# Altium PCB Control board.PcbDoc
Units mm, origin at the board's own origin, x right, y up, seen from the top; angles counter-clockwise.
Board outline 74.55 x 83.83 mm, 2 copper layers (Top Layer, Bottom Layer); 75 components, 51 nets, 277 pads, 29 vias.
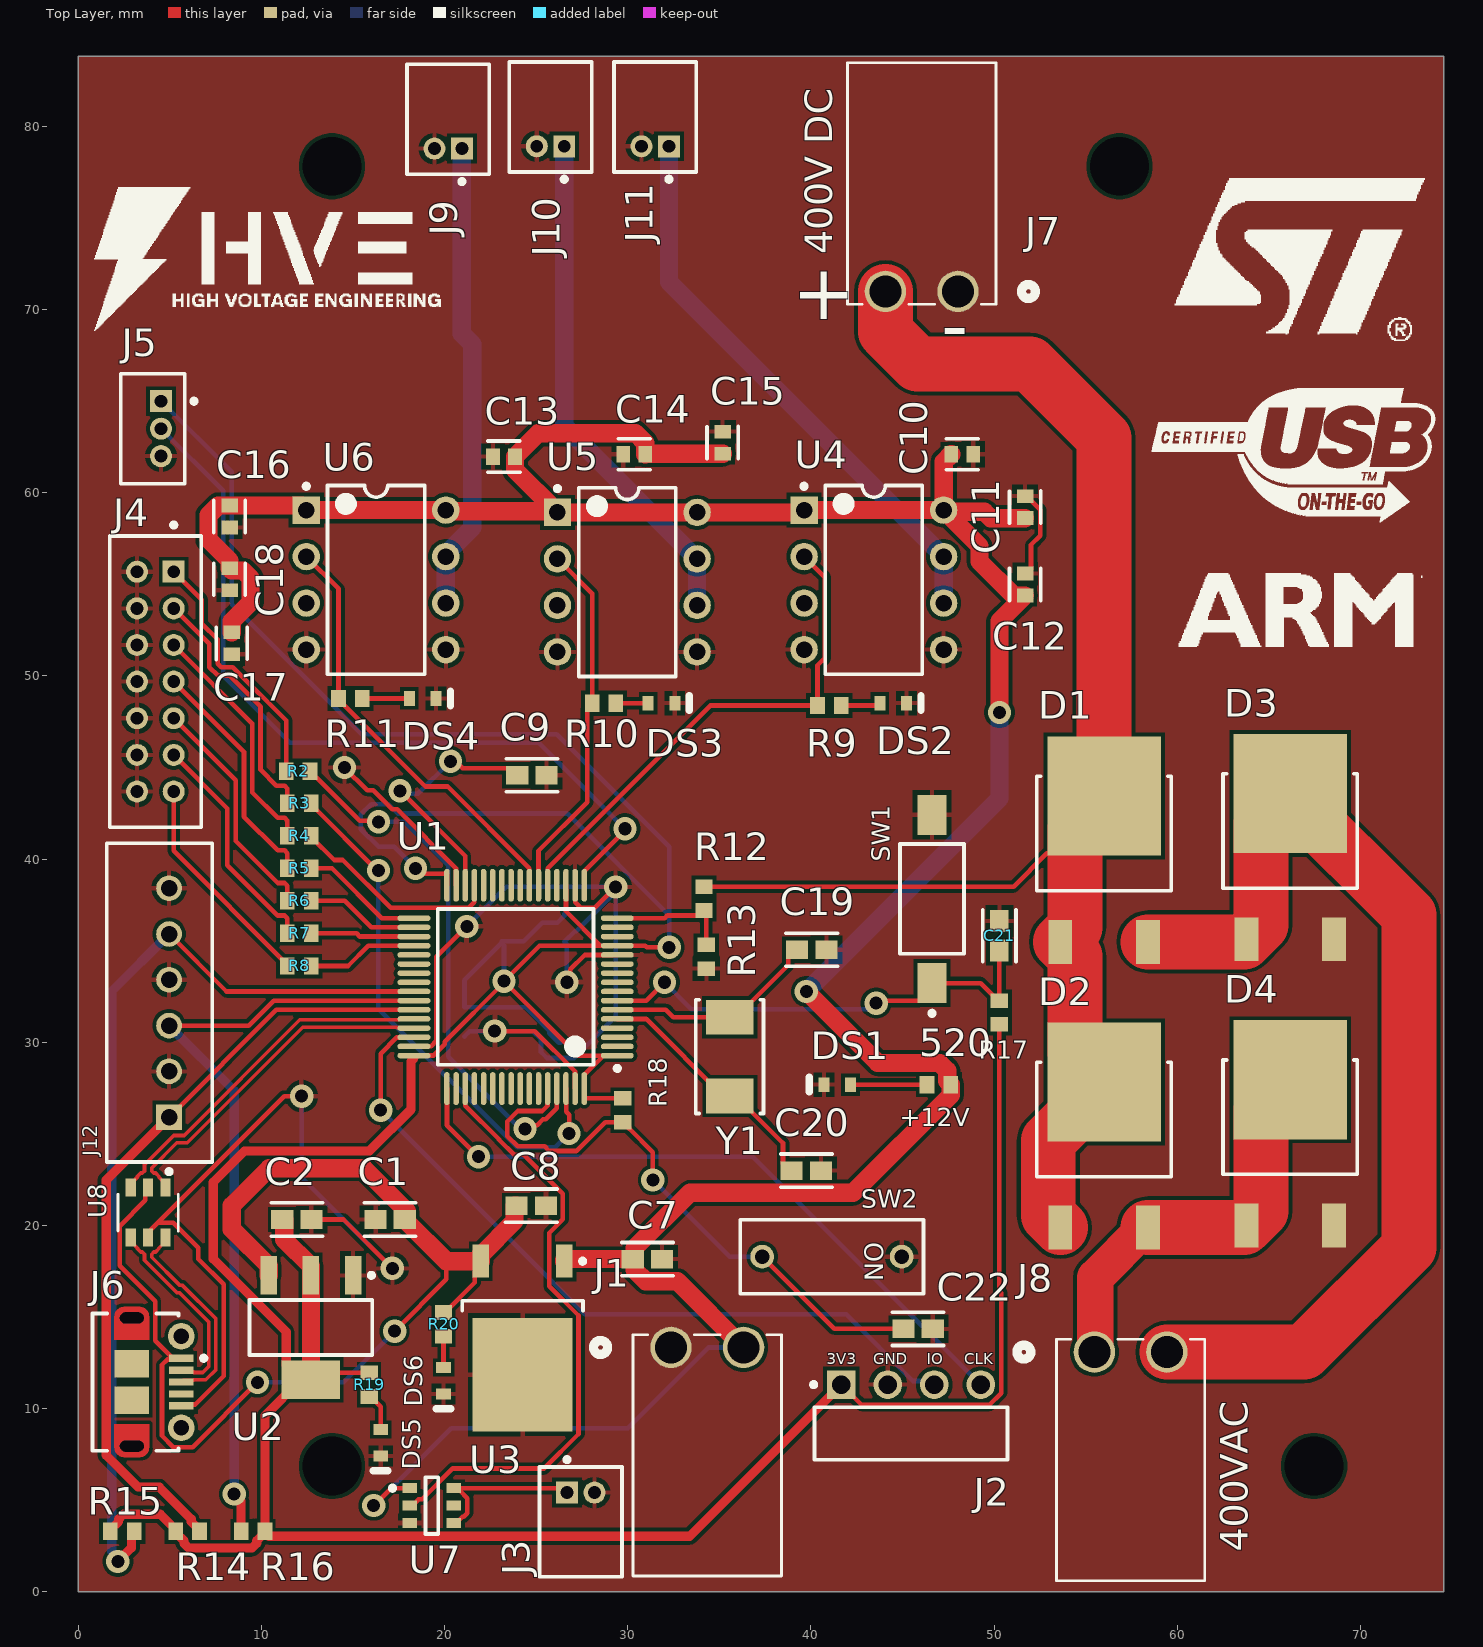
[diagram p0: Top Layer view]
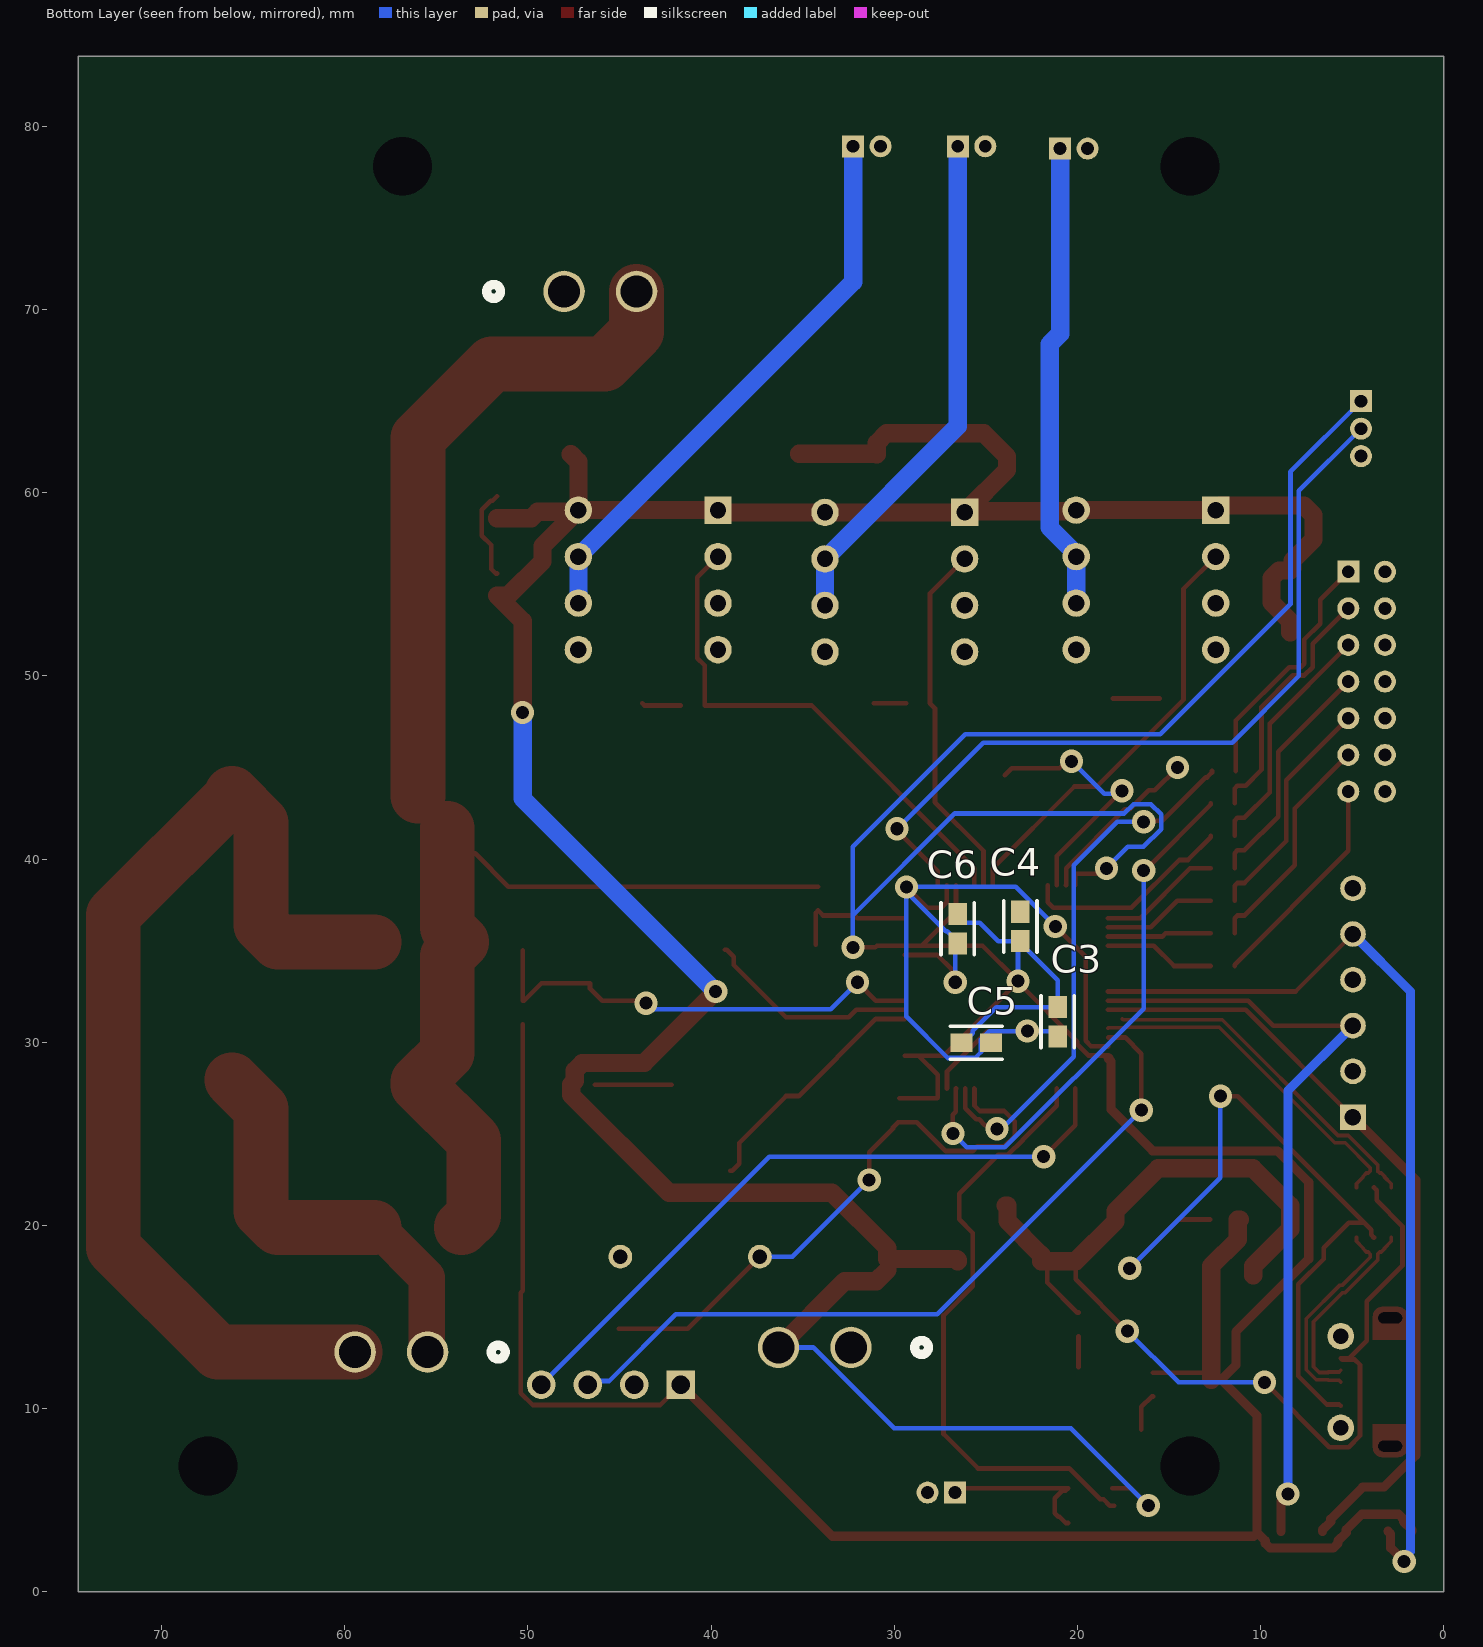
[diagram p1: Bottom Layer view, seen from below]
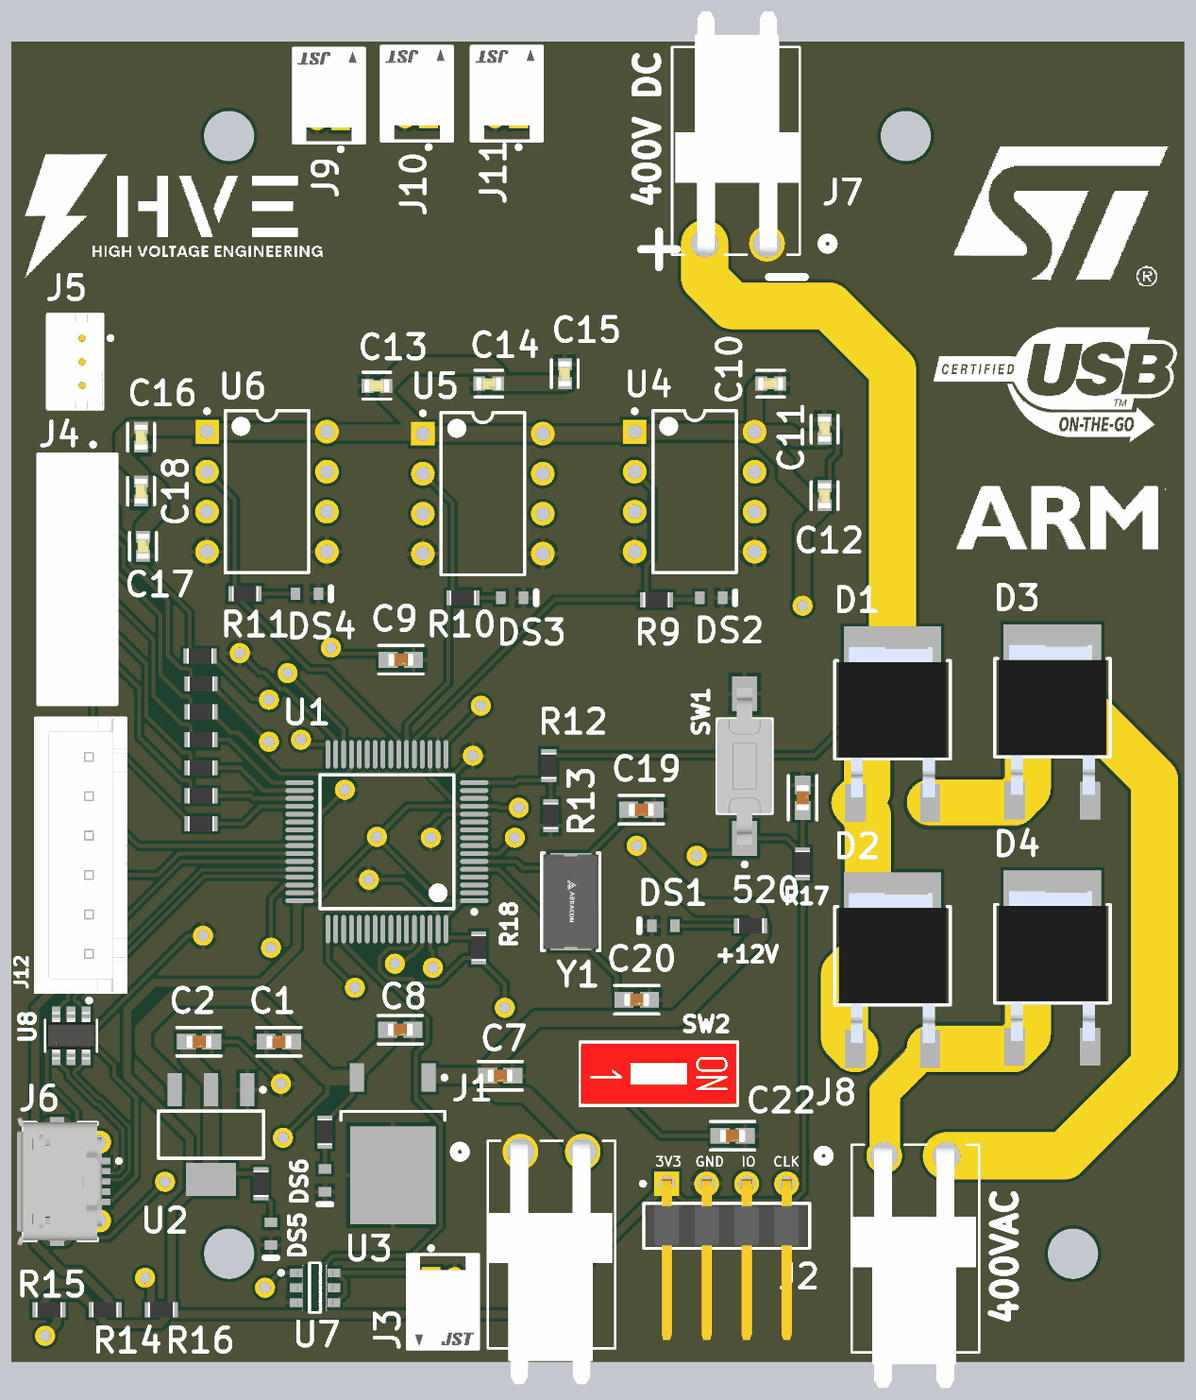
[diagram p2: 3D render of the assembled board from above, using the file's embedded part models]
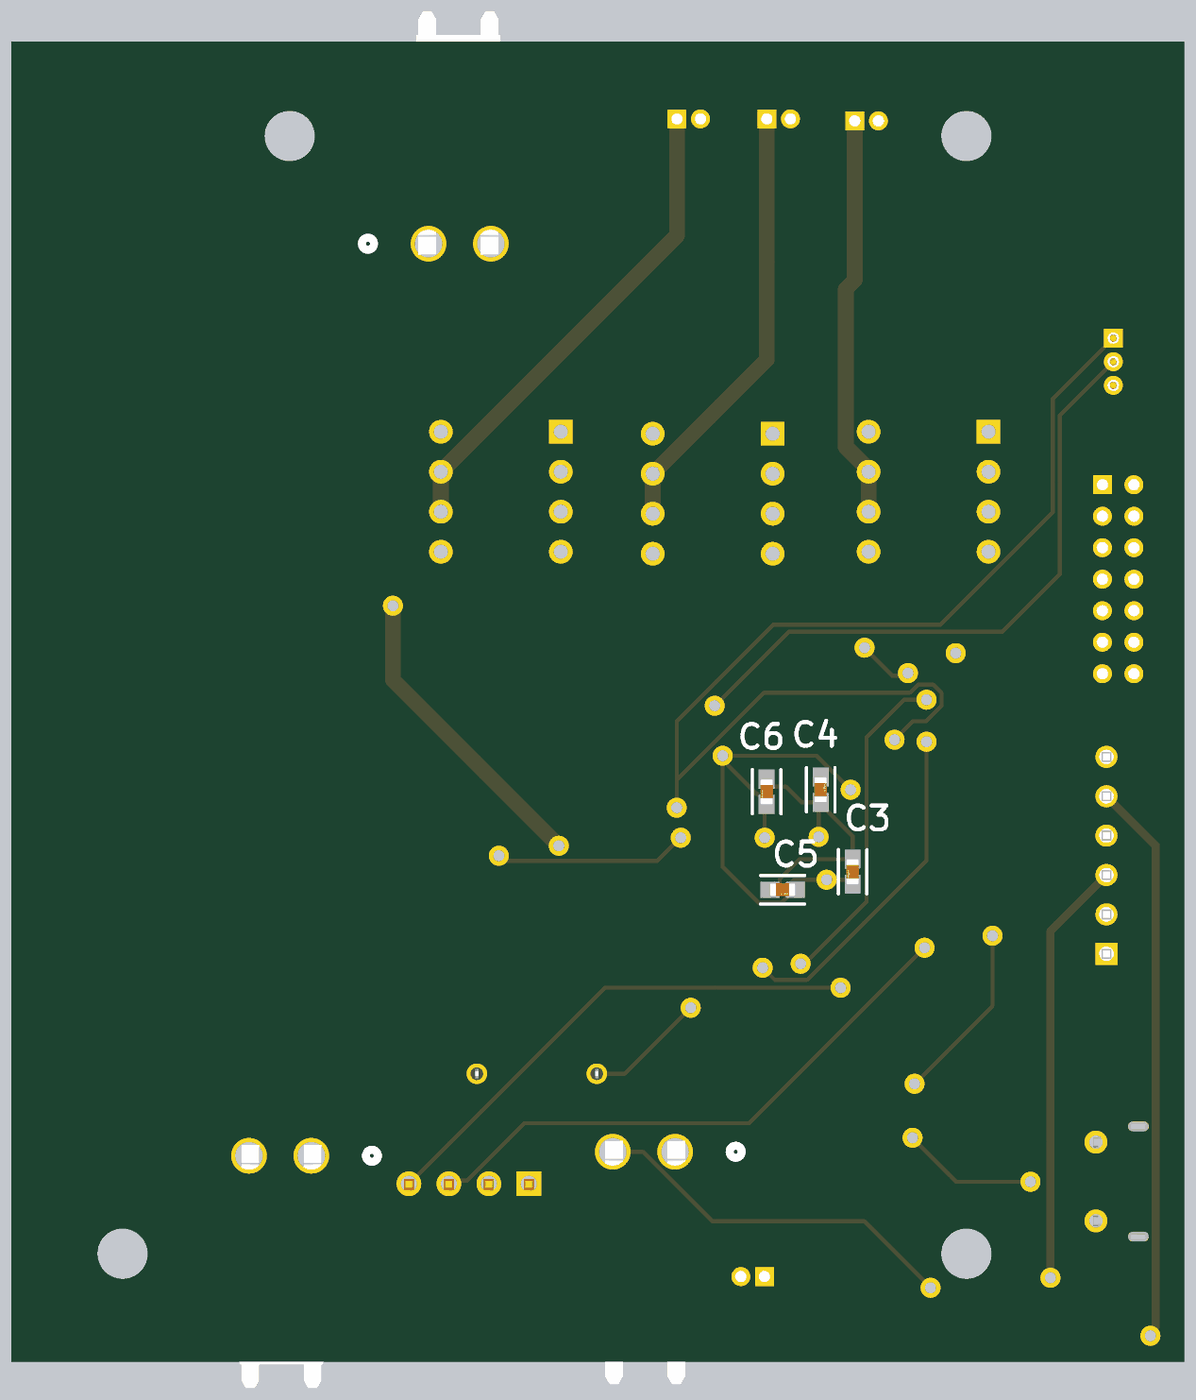
[diagram p3: 3D render of the assembled board from below, using the file's embedded part models]

## Layer stack, top to bottom
Top Solder: solder mask 0.0102, Solder Resist, Dk 3.5
Top Layer: signal copper 0.0356
Dielectric 1: dielectric 0.32, FR-4, Dk 4.8
Bottom Layer: signal copper 0.0356
Bottom Solder: solder mask 0.0102, Solder Resist, Dk 3.5

## Board outline
0,0 74.55,0 74.55,83.83 0,83.83

## Design rules (kind name [scope] priority, off if disabled: settings)
Clearance [All] p1: gap=0.2 ignorepadtopadclearanceinfootprint=FALSE except(0: Arc-Hole Track-Hole SMDPad-Hole THPad-Hole Via-Hole Fill-Hole Poly-Hole Region-Hole Text-Hole; 0.15: SMDPad-SMDPad)
DiffPairsRouting [All] p1: maxlimit=0.254 minlimit=0.01 mostfreqgap=0.254 toplayer_prefgap=0.2 toplayer_minwidth=0.05 toplayer_maxwidth=0.2 toplayer_prefwidth=0.1 bottomlayer_mingap=0.15 bottomlayer_minwidth=0.2 bottomlayer_maxwidth=0.381 bottomlayer_prefwidth=0.381 maxuncoupledlength=12.7
HoleSize [All] p1: absolutevalues=TRUE maxlimit=10 minlimit=0.025 maxpercent=80.000 minpercent=20.000
MinimumSolderMaskSliver [All] p1: minsoldermaskwidth=0.1
PolygonConnect [All] p1: connectstyle=Relief reliefconductorwidth=0.254 reliefentries=4 polygonreliefangle="90 Angle" airgapwidth=0.254
RoutingVias [All] p1: holewidth=0.711 width=1.27 viastyle="Through Hole" minholewidth=0.711 minwidth=1.27 maxholewidth=0.711 maxwidth=1.27
SilkToSolderMaskClearance [IsPad] p1: minsilkscreentomaskgap=0.1 clearancetoexposedcopper=TRUE
SolderMaskExpansion [All] p1: expansion=0 istentingtop=FALSE
Width [All] p1: maxlimit=10 minlimit=0.254 preferedwidth=0.254 minimp=50.000000 maximp=50.000000 favimp=50.000000
26 further rules are at their usual default settings.

## Classes and differential pairs
component class "Control Board 2": C21 C22 J4 J6 J12 R17 R18 SW1 SW2 U7 U8
component class "Control board": 520 C1 C2 C3 C4 C5 C6 C7 C8 C9 C10 C11 C12 C13 C14 C15 C16 C17 C18 C19 C20 D1 D2 D3 D4 DS1 DS2 DS3 DS4 DS5 DS6 J1 J2 J3 J5 J7 J8 J9 J10 J11 R2 R3 R4 R5 R6 R7 R8 R9 R10 R11 R12 R13 R14 R15 R16 R19 R20 U1 U2 U3 U4 U5 U6 Y1
differential pair USB: +USB_P -USB_N
differential pair CONN_D: +CONN_D_P -CONN_D_N

## Components (designator, comment, footprint, x,y, rotation, side; value= is the part's Value field where it differs from the comment)
520 "1k" RESC1609X50X30NL8T20 46.99,27.686 r0 top
C1 "0.1u" FP-GRM188-0_1-e0_2_0_55-IPC_A 17.018,20.32 r180 top
C2 "10u" FP-GRM188-0_1-e0_2_0_55-IPC_A 11.938,20.32 r0 top
C3 "0.1u" FP-GRM188-0_1-e0_2_0_55-IPC_A 21.082,31.115 r270 bottom
C4 "0.1u" FP-GRM188-0_1-e0_2_0_55-IPC_A 23.114,36.322 r90 bottom
C5 "0.1u" FP-GRM188-0_1-e0_2_0_55-IPC_A 25.527,29.972 r180 bottom
C6 "0.1u" FP-GRM188-0_1-e0_2_0_55-IPC_A 26.543,36.195 r270 bottom
C7 "0.33u" FP-GRM188-0_1-e0_2_0_55-IPC_A 31.075,18.161 r0 top
C8 "0.1u" FP-GRM188-0_1-e0_2_0_55-IPC_A 24.725,21.082 r0 top
C9 "2.2u" FP-GRM188-0_1-e0_2_0_55-IPC_A 24.765,44.577 r0 top
C10 "0.1u" FP-C0603C-CF-MFG 48.26,62.103 r0 top value="0.10 μF"
C11 "0.1u" FP-C0603C-CF-MFG 51.689,59.217 r90 top value="0.10 μF"
C12 "4.7u" FP-C0603C-CF-MFG 51.689,54.991 r90 top value="0.10 μF"
C13 "0.1u" FP-C0603C-CF-MFG 23.241,61.976 r180 top value="0.10 μF"
C14 "0.1u" FP-C0603C-CF-MFG 30.353,62.103 r180 top value="0.10 μF"
C15 "4.7u" FP-C0603C-CF-MFG 35.179,62.738 r90 top value="0.10 μF"
C16 "0.1u" FP-C0603C-CF-MFG 8.255,58.709 r270 top value="0.10 μF"
C17 "0.1u" FP-C0603C-CF-MFG 8.382,51.781 r270 top value="0.10 μF"
C18 "4.7u" FP-C0603C-CF-MFG 8.255,55.28 r270 top value="0.10 μF"
C19 "26p" FP-GRM188-0_1-e0_2_0_55-IPC_A 40.045,35.052 r0 top
C20 "26p" FP-GRM188-0_1-e0_2_0_55-IPC_A 39.751,22.987 r0 top
C21 "0.1u" FP-GRM188-0_1-e0_2_0_55-IPC_A 50.292,35.814 r90 top
C22 "0.1u" FP-GRM188-0_1-e0_2_0_55-IPC_A 45.847,14.351 r0 top
D1 "C3D02065E" FP-TO-252-2_v2-MFG 56.007,41.392 r0 top
D2 "C3D02065E" FP-TO-252-2_v2-MFG 56.007,25.781 r0 top
D3 "C3D02065E" FP-TO-252-2_v2-MFG 66.167,41.529 r0 top
D4 "C3D02065E" FP-TO-252-2_v2-MFG 66.167,25.908 r0 top
DS1 "POWER" VISH-TLMX1100_V 41.439,27.686 r180 top
DS2 "Coil 1" VISH-TLMX1100_V 44.487,48.514 r0 top
DS3 "Coil 2" VISH-TLMX1100_V 31.84,48.514 r0 top
DS4 "Coil 3" VISH-TLMX1100_V 18.796,48.768 r0 top
DS5 "3V3" VISH-TLMX1100_V 16.51,8.128 r270 top
DS6 "+5V" VISH-TLMX1100_V 19.939,11.52 r270 top
J1 "B2PS-VH(LF)(SN)" CONN_B2PS-VH_JST 32.362,13.335 r0 top
J2 "PH1RB-04-UA" FP-PH1RB-04-UA-MFG 45.466,8.636 r180 top
J3 "S2B-ZR(LF)(SN)" FP-S2B-ZR_LF_SN-MFG 27.432,3.81 r0 top
J4 "B14B-PHDSS(LF)(SN)" FP-B14B-PHDSS_LF_SN-MFG 4.207,49.689 r90 top
J5 "B3B-ZR(LF)(SN)" FP-B3B-ZR_LF_SN-MFG 4.064,63.5 r90 top
J6 "105017-0001" USB-MICRO-B_V 4.271,11.446 r270 top
J7 "B2PS-VH(LF)(SN)" CONN_B2PS-VH_JST 48.029,70.993 r180 top
J8 "B2PS-VH(LF)(SN)" CONN_B2PS-VH_JST 55.476,13.081 r0 top
J9 "S2B-ZR(LF)(SN)" FP-S2B-ZR_LF_SN-MFG 20.193,80.391 r180 top
J10 "S2B-ZR(LF)(SN)" FP-S2B-ZR_LF_SN-MFG 25.781,80.518 r180 top
J11 "S2B-ZR(LF)(SN)" FP-S2B-ZR_LF_SN-MFG 31.496,80.518 r180 top
J12 "B6B-XH-A(LF)(SN)" FP-B6B-XH-A_LF_SN-MFG 4.428,32.158 r90 top
R2 "1k" RESC1609X50X30NL8T20 12.002,44.805 r0 top
R3 "1k" RESC1609X50X30NL8T20 12.065,43.053 r0 top
R4 "1k" RESC1609X50X30NL8T20 12.065,41.275 r0 top
R5 "1k" RESC1609X50X30NL8T20 12.065,39.497 r0 top
R6 "1k" RESC1609X50X30NL8T20 12.065,37.719 r0 top
R7 "1k" RESC1609X50X30NL8T20 12.065,35.941 r0 top
R8 "1k" RESC1609X50X30NL8T20 12.065,34.163 r0 top
R9 "1k" RESC1609X50X30NL8T20 41.006,48.387 r180 top
R10 "1k" RESC1609X50X30NL8T20 28.702,48.514 r180 top
R11 "1k" RESC1609X50X30NL8T20 14.859,48.768 r180 top
R12 "1k" RESC1609X50X30NL8T20 34.163,37.846 r90 top
R13 "1k" RESC1609X50X30NL8T20 34.29,34.671 r90 top
R14 "1k" RESC1609X50X30NL8T20 5.969,3.302 r180 top
R15 "1k" RESC1609X50X30NL8T20 2.398,3.302 r180 top
R16 "1k" RESC1609X50X30NL8T20 9.54,3.302 r0 top
R17 "10k" RESC1609X50X30NL8T20 50.292,31.623 r90 top
R18 "10k" RESC1609X50X30NL8T20 29.718,26.289 r270 top
R19 "1k" RESC1609X50X30NL8T20 15.875,11.303 r90 top
R20 "1k" RESC1609X50X30NL8T20 19.939,14.59 r90 top
SW1 "FSMSMTR" TECO-FSMSMTR_V 46.609,37.823 r90 top
SW2 "418117270901" 418117270901 41.148,18.288 r270 top
U1 "STM32F401RBT6" STM-LQFP64_N 23.876,33.02 r180 top
U2 "LD1117S33TR" SOT-223_L 12.7,14.422 r270 top
U3 "L78M05CDT-TR" TO-252_L 24.257,13.843 r270 top
U4 "TC4420VPA" PDIP300-PA8 43.434,55.245 r0 top
U5 "TC4420VPA" PDIP300-PA8 29.972,55.118 r0 top
U6 "TC4420VPA" PDIP300-PA8 16.256,55.245 r0 top
U7 "ZXGD3005E6TA" FP-SOT26_SC74R-MFG 19.304,4.699 r0 top
U8 "USBLC6-2SC6" SOT23-6L_STM 3.81,20.701 r90 top
Y1 "" FP-ABM7-MFG 35.56,29.21 r270 top

## Footprints (in the part's own frame and the unit in brackets; to place one, negate y for a bottom-side part, rotate by r counter-clockwise, add the part's x,y. Pads: shape width x height; smd on the part's side, far side on the other; paste and mask are expansions set on the pad)
418117270901 [mm] "2.54 mm compact THT with raised actuator, 1p"
  round 1.3 hole 0.8: 1(0,-3.81) 2(0,3.81)
  silkscreen extent -2.02,-5 2.02,5, body extent -1.92,-4.95 1.92,4.95, height 6.9
CONN_B2PS-VH_JST [mil]
  round 89 / inner round 60 / far side round 89 hole 69 paste-99999 mask+0: 1(0,0) 2(155.91,0)
  silkscreen extent -166,-492 237,27, body extent -80,-582 230,27, height 335
FP-ABM7-MFG [mm]
  rect 1.9x2.6 smd paste+0 mask+0: 1(-2.15,0) 2(2.15,0)
  silkscreen extent -3.1,-1.85 3.1,1.85, body extent -3.2,-1.95 3.2,1.95, height 0.25
FP-B3B-ZR_LF_SN-MFG [mm]
  rect 1.2x1.2 hole 0.7 paste-2539.97 mask+0: 1(1.5,-0.45)
  round 1.2 hole 0.7 paste-2539.97 mask+0: 2(0,-0.45) 3(-1.5,-0.45)
  silkscreen extent -3,-2.38 3,1.75, body extent -3.1,-1.85 3.1,1.85, height 0.25
FP-B6B-XH-A_LF_SN-MFG [mm]
  rect 1.4x1.4 hole 0.9 paste-2539.97 mask+0: 1(-6.25,-0.525)
  round 1.4 hole 0.9 paste-2539.97 mask+0: 2(-3.75,-0.525) 3(-1.25,-0.525) 4(1.25,-0.525) 5(3.75,-0.525) 6(6.25,-0.525)
  silkscreen extent -9.35,-2.88 8.7,2.88, body extent -8.8,-2.98 8.8,2.98, height 0.25
FP-B14B-PHDSS_LF_SN-MFG [mm]
  rect 1.2x1.2 hole 0.7 paste-2539.97 mask+0: 1(6,-1)
  round 1.2 hole 0.7 paste-2539.97 mask+0: 2(6,1) 3(4,-1) 4(4,1) 5(2,-1) 6(2,1) 7(0,-1) 8(0,1) 9(-2,-1) 10(-2,1) 11(-4,-1) 12(-4,1) 13(-6,-1) 14(-6,1)
  silkscreen extent -7.95,-2.5 8.67,2.5, body extent -8.05,-2.6 8.05,2.6, height 0.25
FP-C0603C-CF-MFG [mm]
  rect 0.75x0.9 smd paste+0 mask+0: 1(-0.6,0) 2(0.6,0)
  silkscreen extent -0.87,-0.85 0.88,0.85, body extent -1.2,-0.6 1.2,0.6, height 0.25
FP-GRM188-0_1-e0_2_0_55-IPC_A [mm]
  rect 1.208x1.012 smd paste+0 mask+0: 1(-0.802,0) 2(0.802,0)
  silkscreen extent -1.41,-0.91 1.41,0.91, body extent -1.91,-1.01 1.91,1.01, height 0.25
FP-PH1RB-04-UA-MFG [mm]
  rect 1.57x1.57 hole 1.02 paste-2539.97 mask+0: 1(3.81,-2.667)
  round 1.57 hole 1.02 paste-2539.97 mask+0: 2(1.27,-2.667) 3(-1.27,-2.667) 4(-3.81,-2.667)
  silkscreen extent -5.27,-2.79 5.44,1.44, body extent -5.37,-3.55 5.37,7.89, height 0.25
FP-S2B-ZR_LF_SN-MFG [mm]
  rect 1.2x1.2 hole 0.7 paste-2539.97 mask+0: 1(-0.75,1.6)
  round 1.2 hole 0.7 paste-2539.97 mask+0: 2(0.75,1.6)
  silkscreen extent -2.25,-3 2.25,3.52, body extent -2.35,-3.1 2.35,3.1, height 0.25
FP-SOT26_SC74R-MFG [mm]
  rect 0.8x0.55 smd paste+0 mask+0: 1(-1.2,0.95) 2(-1.2,0) 3(-1.2,-0.95) 4(1.2,-0.95) 5(1.2,0) 6(1.2,0.95)
  silkscreen extent -2.27,-1.55 0.35,1.55, body extent -1.7,-1.65 1.7,1.65, height 0.25
FP-TO-252-2_v2-MFG [mm]
  rect 1.3x2.4 smd paste+0 mask+0: 1(-2.39,-5.908) 2(2.39,-5.908)
  rect 6.2x6.5 smd paste+0 mask+0: 3(0,2.042)
  silkscreen extent -3.67,-3.12 3.67,3.12, body extent -3.77,-7.21 3.77,5.39, height 0.25
PDIP300-PA8 [mm] "DIP, 8-Pin, Row Spacing 7.62 mm, Pitch 2.54 mm"
  rect 1.5x1.5 hole 0.9: 1(-3.81,3.81)
  round 1.5 hole 0.9: 2(-3.81,1.27) 3(-3.81,-1.27) 4(-3.81,-3.81) 5(3.81,-3.81) 6(3.81,-1.27) 7(3.81,1.27) 8(3.81,3.81)
  silkscreen extent -3.93,-5.15 2.65,5.23, body extent -3.6,-5.15 3.6,5.15, height 5.33
RESC1609X50X30NL8T20 [mm] "Chip Resistor, 2-Leads, Body 1.65x0.95mm, IPC Medium Density"
  rect 0.8x0.95 smd: 1(-0.65,0) 2(0.65,0)
  body extent -0.82,-0.48 0.82,0.48, height 0.5
SOT23-6L_STM [mil]
  rect 38.5x22 smd paste+0 mask+0: 1(-53.75,37.4) 2(-53.75,0) 3(-53.75,-37.4) 4(53.75,-37.4) 5(53.75,0) 6(53.75,37.4)
  silkscreen extent -40,-65 40,65, body extent -59,-60 59,60, height 57
SOT-223_L [mm] "SOT223, 4-Leads, Body 6.5x3.5mm, Pitch 2.3mm, Lead Span 7mm, IPC High Density"
  rect 2.1x0.9 smd: 1(-2.85,2.3) 2(-2.85,0) 3(-2.85,-2.3)
  rect 2.1x3.2 smd: 4(2.85,0)
  silkscreen extent -2.97,-3.35 1.5,3.43, body extent -1.85,-3.35 1.85,3.35, height 1.8
STM-LQFP64_N [mm] "Thin QFP, 64-Leads, Body 10x10mm, Pitch 0.5mm, IPC Medium Density"
  oval 1.8x0.3 smd: 1(-5.55,3.75) 2(-5.55,3.25) 3(-5.55,2.75) 4(-5.55,2.25) 5(-5.55,1.75) 6(-5.55,1.25) 7(-5.55,0.75) 8(-5.55,0.25) 9(-5.55,-0.25) 10(-5.55,-0.75) 11(-5.55,-1.25) 12(-5.55,-1.75) 13(-5.55,-2.25) 14(-5.55,-2.75) 15(-5.55,-3.25) 16(-5.55,-3.75) 33(5.55,-3.75) 34(5.55,-3.25) 35(5.55,-2.75) 36(5.55,-2.25) 37(5.55,-1.75) 38(5.55,-1.25) 39(5.55,-0.75) 40(5.55,-0.25) 41(5.55,0.25) 42(5.55,0.75) 43(5.55,1.25) 44(5.55,1.75) 45(5.55,2.25) 46(5.55,2.75) 47(5.55,3.25) 48(5.55,3.75)
  oval 0.3x1.8 smd: 17(-3.75,-5.55) 18(-3.25,-5.55) 19(-2.75,-5.55) 20(-2.25,-5.55) 21(-1.75,-5.55) 22(-1.25,-5.55) 23(-0.75,-5.55) 24(-0.25,-5.55) 25(0.25,-5.55) 26(0.75,-5.55) 27(1.25,-5.55) 28(1.75,-5.55) 29(2.25,-5.55) 30(2.75,-5.55) 31(3.25,-5.55) 32(3.75,-5.55) 49(3.75,5.55) 50(3.25,5.55) 51(2.75,5.55) 52(2.25,5.55) 53(1.75,5.55) 54(1.25,5.55) 55(0.75,5.55) 56(0.25,5.55) 57(-0.25,5.55) 58(-0.75,5.55) 59(-1.25,5.55) 60(-1.75,5.55) 61(-2.25,5.55) 62(-2.75,5.55) 63(-3.25,5.55) 64(-3.75,5.55)
  silkscreen extent -5.68,-4.25 4.25,4.57, body extent -5,-5 5,5, height 1.6
TECO-FSMSMTR_V [mm] "SMD, 2-Leads, Body 6x3.5mm, Pitch 9.19mm"
  rect 2.2x1.6 smd: 1(-4.595,0)
  rect 2.18x1.6 smd: 2(4.595,0)
  silkscreen extent -6.37,-1.75 3,1.75, body extent -4.98,-1.75 4.98,1.75, height 4.4
TO-252_L [mm] "D-PAK, 4-Leads, Body 6.1x6.5mm, Pitch 2.28mm, Lead Span 9.7mm, IPC High Density"
  rect 1.8x0.9 smd: 1(-4.2,2.28) 3(-4.2,-2.28)
  rect 6.2x5.45 smd: 4(2,0)
  silkscreen extent -4.32,-3.3 -1.5,3.41, body extent -2.05,-3.3 4.15,3.3, height 2.4
USB-MICRO-B_V [mm] "USB, MICRO B, Body 7.491x4.695 mm, Pitch 0.65 mm"
  rect 0.4x1.35 smd mask+0: 1(-1.3,1.35) 2(-0.65,1.35) 3(0,1.35) 4(0.65,1.35) 5(1.3,1.35)
  round 1.45 hole 0.85: 6(-2.5,1.35) 7(2.5,1.35)
  rrect50% 0x0 hole 0.6 slot 1.3 at 90 deg: 8(-3.5,-1.35) 11(3.5,-1.35)
  rect 1.5x1.9 smd: 9(-1,-1.35) 10(1,-1.35)
  Top Layer circle w0.5: c-3.6,-1.8 r0.25
  Top Layer circle w0.5: c-3.6,-0.9 r0.25
  Top Layer circle w0.5: c3.6,-1.8 r0.25
  Top Layer circle w0.5: c3.6,-0.9 r0.25
  Top Layer region: -3.6,-1.8 -3.6,-0.9 -4.1,-0.9 -4.1,-1.8
  Top Layer region: 3.6,-0.9 3.6,-1.8 4.1,-1.8 4.1,-0.9
  Top Layer region: 2.3,-0.4 2.3,-2.3 3.6,-2.3 3.6,-0.4
  Top Layer region: -2.3,-2.3 -2.3,-0.4 -3.6,-0.4 -3.6,-2.3
  silkscreen extent -3.75,-3.5 3.75,2.7, body extent -4.1,-3.9 4.1,1.5, height 2.67
VISH-TLMX1100_V [mm] "SMD, 2-Leads, Body 1.6x0.8mm"
  rect 0.6x0.8 smd: 1(-0.725,0) 2(0.725,0)
  silkscreen extent 1.53,-0.4 1.53,0.4, body extent -0.8,-0.4 0.8,0.4, height 0.65

## Part data
520 R2 R3 R4 R5 R6 R7 R8 R9 R10 R11 R12 R13 R14 R15 R16 R17 R18 R19 R20: library part CMP-1666-00005-4, "Chip Resistor, 10 KOhm, +/- 1%, 100 mW, -55 to 155 degC, 0603 (1608 Metric), RoHS, Tape and Reel", Manufacturer="Vishay Semiconductor", Max Operating Temperature="155 degC", Min Operating Temperature="-55 degC", Package Quantity=5000, Voltage Rating="75 V", ComponentLink1Description="Manufacturer URL", ComponentLink1URL=http://www.vishay.com/, ComponentLink2Description=Datasheet, ComponentLink2URL=https://datasheet.ciiva.com/11809/0900766b80d98afc-11809037.pdf, DatasheetVersion=06/2012, Height="0.45 mm", Length="1.55 mm", Mounting Technology="Surface Mount", PackageDescription="2-Pin Surface Mount Device, Body 1.575 x 0.85 mm", PackageReference=0603, Packaging="Tape and Reel", REACH SVHC=Unknown, RoHSCompliant=true
C1 C2 C3 C4 C5 C6 C7 C8 C9 C19 C20 C21 C22: library part CMP-2006-02792-2, "Chip Multilayer Ceramic Capacitors for General Purpose, 0603, 10uF, X5R, 15%, 20%, 6.3V", Capacitance=10uF, Case Code (Imperial)=0603, Case Code (Metric)=1608, Dielectric=X5R, Max Operating Temperature=85°C, Min Operating Temperature=-55°C, Package Quantity=4000, Tolerance=20%, Voltage=6.3V, Case/Package=0603, Depth=0.8mm, Height=0.8mm, Lead Free="Lead Free", Length=1.6mm, Material=Ceramic, Mount="Surface Mount", Packaging="Tape and Reel", Radiation Hardening=No, REACH SVHC="No SVHC", Termination=SMD/SMT, Thickness=0.035inch, Voltage Rating=6.3V, Voltage Rating (DC)=6.3V, Width=0.031inch
C10 C11 C12 C13 C14 C15 C16 C17 C18: library part CMP-2006-03061-2, "CAP CER 0.1UF 50V X7R 0603", Capacitance="0.10 μF", Manufacturer=KEMET, Manufacturer Part Number=C0603C104K5RACTU, Package=C0603C-CF, Temperature="-55°C to +125°C", Temperature Characteristic=X7R, Temperature Coefficient=30ppm/°C, Temperature Range High=+125°C, Temperature Range Low=-55°C, Tolerance=0.1, Voltage Rating="50 V", Automotive=Yes, Automotive Grade="Grade 1", Category=Cap, ComponentLink2Description=Datasheet, ComponentLink2URL=https://api.kemet.com/component-edge/download/datasheet/C0603C100J5GACAUTO.pdf, Device Class L1="Passive Components", Device Class L2=Capacitors, Device Class L3="Ceramic Capacitors", Digikey Description="CAP CER 0.1UF 50V X7R 0603", Height=0.87mm, Lead Free=Yes, Material=Ceramic, Octopart=https://octopart.com/c0603c104k5ractu-kemet-139244, RoHS=TRUE
D1 D2 D3 D4: library part CMP-240925-000076-3, "DIODE SCHOTTKY 650V 2A TO252-2", Average Rectified Current=8A, Case/Package=TO-252-3, Max Reverse Voltage (DC)=650V, Mount="Surface Mount", Number of Pins=3, Packaging=Rail/Tube, Reverse Recovery Time=0ns, RoHS Compliant=Yes, Series=Z-Rec®
DS1 DS2 DS3 DS4 DS5 DS6: library part CMP-1666-00027-1, "LED, RED, 2.1 V, -40 to 100 degC, 2-Pin SMD (0603), RoHS, Tape and Reel", Capacitance="12 pF", Case Code (Imperial)=0603, Case Code (Metric)=1608, Max Operating Temperature=125degC, Min Operating Temperature=-55degC, Package Quantity=4000, Resistance="100000000000 Ohm", Tolerance=5%, Type (Capacitors)=C0G, Voltage Rating="50 V", Case/Package=0603, ComponentLink1Description="Manufacturer URL", ComponentLink1URL=http://www.vishay.com/, ComponentLink2Description=Datasheet, ComponentLink2URL=http://www.vishay.com/docs/83173/tlmb1100.pdf, DatasheetVersion="Rev. 2.7, 03/2016", Height="0.8 mm", Length="1.6 mm", Mount="Surface Mount", PackageDescription="2-Pin Surface Mount Device, Body 1.6 x 0.8 mm", PackageReference=TLMX1100, Packaging="Tape and Reel", Pins=2, Radiation Hardening=No, REACH SVHC="No SVHC", RoHSCompliant=True, Voltage Rating (DC)="50 V", Width="0.8 mm"
J1 J7 J8: library part B2PS-VHLFSN, "No Description Available", Mfr_Name=JST, Copyright="Copyright (C) 2023 Ultra Librarian. All rights reserved.", Manufacturer_Part_Number=B2PS-VH(LF)(SN), RefDes=RefDes, Type=DEV
J2: library part CMP-02275-12075420-1, "PH1RB-04-UA Conn Unshrouded Header HDR 4 POS 2.54mm Solder RA Thru-Hole", NexarPartId=12075420, RoHS=Non-Compliant
J3 J9 J10 J11: library part CMP-2000-07021-2, "CONN HEADER R/A 2POS 1.5MM", Color=White, Contact Resistance=30mR, Current Rating=1A, Flammability Rating="UL94 V-0", Housing Color=Beige, Insulation Color=Natural, Insulation Resistance=500MR, Max Operating Temperature=85°C, Max Voltage Rating (AC)=50V, Min Operating Temperature=-25°C, Body Plating=Tin, Connector Type=Header, Contact Finish - Mating=TIN, Contact Material=Brass, Contact Mating Length=0.094inch, Contact Plating=Tin, Contact Shape=Circular, Contact Type="Male Pin", Depth=6mm, Fastening Type=Detent, Gender=Male, Height=7.2mm, Housing Material=Polyamide, Insulation Material=Nylon, Lead Free="Lead Free", Lead Pitch=1.5mm, Length=4.5mm, Material=Nylon, Max Current Rating=1A, Mount="Through Hole", Number of Contacts=2, Number of Pins=2, Number of Positions=2, Number of Rows=1, Orientation="Right Angle", Packaging=Bulk, Panel Thickness=3.5mm, Pitch=1.5mm, REACH SVHC="No SVHC", Series=ZH, Termination=Solder, Voltage Rating=50V, Voltage Rating (AC)=50V, Voltage Rating (DC)=50V, Width=3.5mm
J4: library part CMP-17439-000218-1, "CONN HEADER VERT 14POS 2MM", Color=Natural, Current Rating=3A, Flammability Rating="UL94 V-0", Voltage Rating=250V, Connector Type=Header, Contact Finish - Mating=TIN, Contact Material="Copper Alloy", Contact Mating Length=0.114inch, Contact Plating=Tin, Contact Shape=Square, Contact Type="Male Pin", Fastening Type=Detent, Gender=Male, Height=9.5mm, Housing Color=Natural, Housing Material=Nylon, Insulation Color=Natural, Insulation Material=Nylon, Lead Free="Lead Free", Length=15.9mm, Mated Stacking Heights=8.8mm, Mount="Through Hole", Number of Contacts=14, Number of Positions=14, Number of Rows=2, Packaging=Bulk, Pitch=2mm, Row Spacing=0.079inch, Series=PHD, Termination=Solder, Width=5mm
J5: library part CMP-17439-000041-1, "CONN HEADER VERT 3POS 1.5MM", Color=Natural, Contact Resistance=30mR, Current Rating=1A, Flammability Rating="UL94 V-0", Housing Color=Beige, Insulation Resistance=500MR, Max Operating Temperature=85°C, Max Voltage Rating (AC)=50V, Min Operating Temperature=-25°C, Body Plating=Tin, Connector Type="Male Pin", Contact Material=Copper, Contact Mating Length=0.094inch, Contact Plating=Tin, Contact Type="Male Pin", Depth=3.5mm, Fastening Type=Detent, Gender=Male, Housing Material=Polyamide, Lead Free="Lead Free", Lead Pitch=1.5mm, Length=6mm, Material=Nylon, Max Current Rating=1A, Mount="Through Hole", Number of Contacts=3, Number of Positions=3, Number of Rows=1, Orientation=Straight, Packaging=Bulk, Panel Thickness=3.5mm, Pitch=1.5mm, REACH SVHC="No SVHC", Series=ZH, Termination=Solder, Voltage Rating=50V, Voltage Rating (AC)=50V, Voltage Rating (DC)=50V
J6: library part CMP-2000-05827-1, "Micro-USB B Receptacle, Right Angle, Bottom Mount, Surface Mount, with Solder Tabs, -30 to 85 degC, 5-Pin USB, RoHS, Tape and Reel", Manufacturer=Molex, Package Description="5-Leads USB, Micro B, Body 7.5 x 5 mm, Pitch 0.65 mm", Package Reference=MICRO-B, Package Version="Rev. F, 12/2012", Standard Package=1, Voltage - Max=30V, 3D Model=105017-0001.stp, Catalog Drawings=1050170001, Category=Connectors,Interconnects, Circuits=5, Connector Type=USB-microB, Datasheet URL=http://www.molex.com/elqNow/elqRedir.htm?ref=http://www.molex.com/webdocs/datasheets/pdf/en-us/1050170001_IO_CONNECTORS.pdf, Datasheet Version=03/2016, Family=USB,DVI,HDMIConnectors, Featured Product=Micro-USBConnectorsUSBConnectors, Features=Shielded,SolderRetention, Gender=Receptacle, Ingress Protection=-, Manufacturer URL=http://www.molex.com/, Mating Products=WM17145-ND-CABLEMICROUSBBTOSTDA1.0MWM17147-ND-CABLEMICROUSBBTOSTDA2.0MWM17146-ND-CABLEMICROUSBBTOSTDA1.5M, Mounting Technology=SurfaceMount, Mounting Type=BoardCutout,SurfaceMount,RightAngle, Number of Contacts=5, Online Catalog=Molex-MicroUSB, Other Names=WM1399DKR, Package URL=http://www.molex.com/pdm_docs/sd/1050170001_sd.pdf, Packaging=Digi-Reel®, PCN Assembly/Origin=ResinSupplier21/Oct/2015, RoHS Information=1050170001CertofCompliance, Series=-, Specifications=-
J12: library part CMP-17439-000076-1, "CONN HEADER VERT 6POS 2.5MM"
SW1: library part CMP-2000-07501-1, "FSMSM Push Button Switch, 50 mA, -35 to 85 degC, 2-Pin SMD, RoHS, Tape and Reel", Case\/Package=SMD/SMT, Contact Current Rating=50mA, Contact Resistance=100mOhm, Manufacturer="TE Connectivity", Max Operating Temperature=85degC, Max Voltage Rating (DC)=12V, Min Operating Temperature=-35degC, Operating Force=180gf, Package Description="2-Pin Surface Mount Device, Body 6 x 3.5 mm, Pitch 9.19 mm", Package Quantity=1800, Voltage Rating (DC)=24V, Actuator Length=1.07mm, Actuator Material=Polyamide, Contact Material=Brass, Contact Plating=Silver, Current Rating=50mA, Datasheet URL=http://www.te.com/commerce/DocumentDelivery/DDEController?Action=showdoc&DocId=Customer+Drawing%7F1437566-3%7FC2%7Fpdf%7FEnglish%7FENG_CD_1437566-3_C2_1437566_3_1_c.dwg.pdf%7F1437566-4, Datasheet Version="Rev. C2, 08/2014", Electrical Life=20000Cycles, ELV=Compliant, Illumination Type=Illuminated, Lead Free=LeadFree, Manufacturer URL=http://www.te.com/, Mechanical Life=20000Cycles, Mount=SurfaceMount, Mounting Technology=SurfaceMount, Orientation=Straight, Package Reference=FSMSMTR, Packaging=TapeandReel, REACH SVHC=Unknown, RoHSCompliant=true, Switch Travel=0.25mm, Termination=GullWing, Throw Configuration=SPST
SW2: library part CMP-1435-00001-2, Contact Current Rating=25mA, Contact Resistance=50mΩ, Insulation Resistance=100MΩ, Max Operating Temperature=85°C, Min Operating Temperature=-40°C, Voltage Rating=24V, Body Material="Nylon, Polyamide", Contact Plating=Gold, Current Rating=25mA, Electrical Life=2kcycles, Height=6.95mm, Lead Free="Lead Free", Length=3.84mm, Life (Cycles)=2kcycles, Mechanical Life=5kcycles, Mount="Through Hole", NexarPartId=22584988, Number of Circuits=1, Number of Pins=1, Number of Positions=1, Pitch=2.54mm, RoHS=Compliant, Termination="PC Pin", Throw Configuration=SPST, Voltage Rating (DC)=24V, Washable=No
U1: library part CMP-0243-00094-2, "ARM Cortex-M4 32-bit MCU+FPU, 105 DMIPS, 128 kB Flash, 64 kB Internal RAM, 48 I/Os, 64-pin LQFP, -40 to 85 degC, Tray", I/Os (High Current)=48, Manufacturer=STMicroelectronics, Operating Frequency(F) (Processor speed) (MHz)=84, Supply Voltage(Vcc) max (V)=3.6, Supply Voltage(Vcc) min (V)=1.8, ComponentLink1Description="Manufacturer URL", ComponentLink1URL=http://www.st.com/web/en/home.html, ComponentLink2Description=Datasheet, ComponentLink2URL=http://www.st.com/st-web-ui/static/active/en/resource/technical/document/data_brief/DM00071938.pdf, ComponentLink3Description="Package Specification", ComponentLink3URL=http://www.st.com/st-web-ui/static/active/en/resource/technical/document/datasheet/DM00037051.pdf, Core="ARM Cortex-M4", DatasheetVersion="Rev. 1", FLASH Size (Prog) (kB)=128, Internal RAM Size (kB)=64, Mounting Technology="Surface Mount", PackageDescription="64-Pin Low Profile Quad Flat Package, 10 x 10 mm Body, 0.5 mm Pitch", PackageReference=LQFP64, PackageVersion="Rev. 4, 06/2013", Packing=Tray, PartNumber=STM32F401RBT6
U2: library part CMP-0244-00310-1, "Fixed Low Drop Positive Voltage Regulator, 3.3V, 4-Pin SOT-223, Tape and Reel", ComponentLink1Description="Manufacturer URL", ComponentLink1URL=http://www.st.com, ComponentLink2Description=Datasheet, ComponentLink2URL=http://www.st.com/internet/com/TECHNICAL_RESOURCES/TECHNICAL_LITERATURE/DATASHEET/CD00000544.pdf, DatasheetVersion=1/11/2011, PackageDescription="4-Pin SOT-223 Package, 6.5 x 3.5 mm Body, 2.3 mm Pitch, 7 mm Lead Span", PackageReference=SOT-223, PackageVersion=2010
U3: library part CMP-0244-00178-1, "Positive Voltage Regulator, 5V, 3-Pin DPAK, Tape and Reel", ComponentLink1Description="Manufacturer URL", ComponentLink1URL=http://www.st.com, ComponentLink2Description=Datasheet, ComponentLink2URL=http://www.st.com/internet/com/TECHNICAL_RESOURCES/TECHNICAL_LITERATURE/DATASHEET/CD00000447.pdf, DatasheetVersion=1/11/2010, PackageDescription="3-Pin Transistor Outline Package 2.28 mm Pitch, 9.7 mm Lead Span (DPAK)", PackageReference=TO-252, PackageVersion=2011
U4 U5 U6: library part CMP-0137-00023-1, "6A High-Speed MOSFET Driver, Non-Inverting, Extended Temperature", Code_JEDEC=MS-001-BA, DatasheetVersion="revC, Aug-2004", PackageDescription="8-Lead Plastic Dual In-Line (PA) - 300 mil Body [PDIP]", PackageReference=PDIP300-PA8, PackageVersion="revBB, Aug-2009"
U7: library part CMP-12751-000002-1, "IC GATE DRVR LOW-SIDE SOT26", Manufacturer="DIODES INC.", Max Junction Temp=+150°C, Max Power Dissipation=1.1W, Max Supply Voltage=25V, Nominal Supply Current=0.05uA, Output Current=10A, Package="SOT26 (SC74R)", Temperature="-55°C to +150°C", Temperature Range Low=-55°C, Automotive=Yes, Automotive Grade="Grade 0", Category=IC, ComponentLink2Description=Datasheet, ComponentLink2URL=https://www.diodes.com/assets/Datasheets/ZXGD3005E6.pdf, Device Class L1="Integrated Circuits (ICs)", Device Class L2="Power Management ICs", Device Class L3="Gate Drivers", Digikey Description="IC GATE DRVR LOW-SIDE SOT26", Fall Time=16ns, Footprint Url=https://www.diodes.com/assets/Package-Files/SOT26-SC74R.pdf, Height=1.4mm, Ipc Land Pattern Name=SOT95P280X115-6, Lead Free=Yes, Manufacturer Part Number=ZXGD3005E6TA, Mouser Description="Gate Drivers 10A GATE DRIVER 25V VCC 25V VIN", Number Of Drivers=1, Number Of Outputs=1, Octopart=https://octopart.com/zxgd3005e6ta-diodes+inc.-19727179, Rise Time=8ns, RoHS=TRUE, Standoff Height=0.013mm, Temperature Range High=+150°C
U8: "No Description Available", Mfr_Name=STMicroelectronics, Copyright="Copyright (C) 2023 Ultra Librarian. All rights reserved.", Manufacturer_Part_Number=USBLC6-2SC6, RefDes=RefDes, Type=DEV
Y1: library part CMP-27762-000095-1, "Crystal 16MHz ±20ppm 18pF SMD-2 6mm x 3.5mm", Case/Package=CSMD, ESR (Equivalent Series Resistance)=50R, Frequency=16MHz, Frequency Stability=30ppm, Frequency Tolerance=20ppm, Load Capacitance=18pF, Max Operating Temperature=85°C, Min Operating Temperature=-40°C, Operating Frequency="16 MHz", Package Quantity=1000, Resistor Type=Ceramic, Depth=3.5mm, Height=0.055inch, Lead Free="Lead Free", Length=6mm, Mount="Surface Mount", Number of Pins=2, Packaging="Tape and Reel", Radiation Hardening=No, Series=ABM7, Termination=SMD/SMT, Tolerance=20ppm, Width=3.3mm

## Free pads (board coordinates)
  round 0 hole 3.2 unplated: ""(13.85,6.86) ""(13.85,77.83) ""(56.85,77.83) ""(67.47,6.86)

## Via types
v1: diameter 1.27, hole 0.711, Top Layer to Bottom Layer, 29 vias

## Nets (pads, with @x,y where several pads share a name; then routed paths per layer and width w, separated by ;. In a path a pad name is that pad's centre, name@x,y a point inside that pad or via, vN(x,y) a via of type N, cw(c..) or ccw(c..) an arc to the next point about the centre after c; other vN are vias at no path point)
+12V: 520.2 C7.1 C10.1 C11.1 C12.1 C13.1 C14.1 C15.1 C16.1 C17.1 C18.1 J1.2 U3.1 U4.1 U4.8 U5.1 U5.8 U6.1 U6.8 U7.1 | length 176.5
  Top Layer w0.254: v1(16.129,4.699) 17.079,5.649 U7.1
  Top Layer w1: C17.1 8.382,52.992 9.405,54.015 9.405,55.345 8.995,55.755 8.38,55.755 C18.1 8.255,56.294 7.105,57.444 7.105,58.774 7.64,59.309 C16.1 10.192,59.309 10.196,59.305 12.196,59.305 U6.1 U6.8 20.13,58.991 U5.1@26.098,58.991 ; U3.1 26.537,18.111 26.587,18.161 C7.1 30.371,18.161 30.377,18.167 30.377,18.762 33.397,21.781 42.3,21.781 47.64,27.121 520.2 47.44,27.886 47.44,28.451 47.03,28.861 43.656,28.861 v1(39.751,32.766) ; 30.377,17.56 30.983,16.955 32.702,16.955 J1.2 ; C15.1 30.988,62.138 C14.1 30.953,62.718 30.418,63.253 25.118,63.253 C13.1 23.841,61.249 U5.1@26.098,58.991 ; C10.1 47.244,61.687 U4.8 ; v1(50.292,48.006) 50.292,52.994 C12.1 51.074,54.391 49.207,56.258 49.207,57.092 U4.8@47.34,58.959 ; C11.1 49.817,58.617 49.475,58.959 U4.8@47.34,58.959 ; U5.1@26.098,58.991 U5.1 39.497,58.928 U4.1 U4.8 ; U4.8 U4.8@47.34,58.959
  Bottom Layer w0.254: v1(16.129,4.699) 20.352,8.922 30.01,8.922 34.423,13.335 J1.2
  Bottom Layer w1: v1(39.751,32.766) 50.292,43.307 v1(50.292,48.006)
BOOT0: C22.1 R18.2 SW2.1 U1.60 | length 32.7
  Top Layer w0.254: U1.60 25.617,27.461 25.617,26.537 25.324,26.243 23.994,26.243 23.422,25.671 23.422,24.875 23.986,24.311 25.464,24.311 25.718,24.057 27.195,24.057 28.777,25.639 R18.2 29.793,25.639 30.066,25.366 30.066,25.291 31.369,23.988 v1(31.369,22.479) ; SW2.1@37.144,18.288 SW2.1 41.275,14.351 C22.1
  Bottom Layer w0.254: v1(31.369,22.479) 35.56,18.288 SW2.1
CONN_D_N: J6.3 U8.3 | length 11.3
  Top Layer w0.2: U8.3 4.76,19.126 4.389,18.756 4.389,18.723 4.214,18.547 4.127,18.547 4.01,18.43 4.01,18.264 5.552,16.722 5.687,16.722 7.512,14.898 7.512,12.122 6.961,11.571 6.313,11.571 6.288,11.546 5.721,11.546 J6.3
CONN_D_P: J6.2 U8.1 | length 10.6
  Top Layer w0.2: U8.1 2.86,19.126 3.231,18.756 3.231,18.723 3.406,18.547 3.493,18.547 3.61,18.43 3.61,18.098 5.386,16.322 5.522,16.322 7.112,14.732 7.112,12.288 6.795,11.971 6.313,11.971 6.288,11.996 5.721,11.996 J6.2
GND: C1.2 C2.2 C3.2 C4.2 C5.2 C6.2 C7.2 C8.2 C9.2 C10.2 C11.2 C12.2 C13.2 C14.2 C15.2 C16.2 C17.2 C18.2 C19.2 C20.2 C21.2 C22.2 D3.2 D4.2 DS1.2 DS2.2 DS3.2 DS4.2 DS5.2 DS6.2 J1.1 J2.2 J3.2 J4.2 J4.4 J4.6 J4.8 J4.10 J4.12 J4.14 J5.3 J6.5 J7.1 J9.2 J10.2 J11.2 J12.2 J12.4 J12.6 R13.1 SW1.2 SW2.2 U1.12 U1.18 U1.31 U1.47 U1.63 U2.1 U3.4 U4.4 U4.5 U5.4 U5.5 U6.4 U6.5 U7.3 U8.2 | length 110.9
  Top Layer w0.254: U8.2 3.962,19.488 3.962,19.769 4.345,20.152 ; J6.5 5.694,10.219 6.381,10.219 7.939,11.777 7.939,16.781 6.557,18.163 6.557,18.77 5.175,20.152 4.345,20.152 ; v1@12.175,27.051 11.244,27.051 4.345,20.152 ; C2.2 14.478,20.32 v1(17.145,17.653) ; v1(14.529,44.996) 15.768,43.757 16.1,43.757 17.145,42.712 17.409,42.712 20.617,39.503 20.617,38.579 U1.31 ; U1.47 18.335,29.779 19.259,29.779 19.553,30.072 19.553,34.666 v1(21.209,36.322) ; v1(22.733,30.607) 24.914,30.607 27.117,28.403 27.117,27.479 U1.63 ; v1(26.67,33.274) 26.864,33.468 26.864,33.976 27.649,34.761 29.417,34.761 U1.12 ; U1.18 27.135,38.561 27.135,37.637 27.428,37.343 28.199,37.343 v1(29.337,38.481) ; C12.2 51.764,55.591 52.012,55.839 52.012,57.147 52.516,57.651 52.516,59.077 52.024,59.569 51.937,59.569 C11.2
  Bottom Layer w0.254: v1(12.192,27.051) 12.192,22.606 v1(17.145,17.653) ; C3.2 21.376,30.607 24.809,30.607 25.262,30.153 25.262,29.466 25.589,29.139 27.069,29.139 29.337,31.407 v1@29.337,38.218 ; v1(21.209,36.322) 23.368,38.481 v1(29.337,38.481) v1@29.337,38.218 ; v1(26.67,33.274) 26.67,35.364 26.543,35.491 27.117,36.066 27.185,36.066 v1@29.337,38.218
Net520_1: 520.1 DS1.1 | length 4.2
  Top Layer w0.254: DS1.1 520.1
NetC1_1: C1.1 C8.1 J6.1 R20.2 U2.3 U3.3 U8.5 | length 66.4
  Top Layer w0.254: U8.5 3.658,21.914 3.658,21.364 2.254,19.96 2.254,17.799 4.198,15.855 4.198,13.694 5.146,12.746 J6.1 5.548,12.673 4.861,12.673 4.569,12.381 4.569,8.51 5.185,7.894 6.243,7.894 v1(9.779,11.43) ; v1(17.272,14.224) 20.097,17.049 20.097,18.043 ; R20.2 20.014,15.24 21.654,16.88 21.654,17.72 U3.3
  Top Layer w1: U2.3 10.4,17.772 8.382,19.79 8.382,21.082 10.414,23.114 15.599,23.114 17.924,20.789 17.924,20.216 20.097,18.043 U3.3 21.977,18.393 23.819,20.235 23.819,21.076 23.825,21.082 C8.1
  Bottom Layer w0.254: v1(9.779,11.43) 14.478,11.43 v1(17.272,14.224)
NetC2_1: C2.1 C3.1 C4.1 C5.1 C6.1 J2.1 J5.1 R14.2 R15.2 R16.2 R17.1 R18.1 R19.2 U1.1 U1.13 U1.19 U1.32 U1.48 U1.64 U2.2 U2.4 | length 250
  Top Layer w0.254: U2.4 13.081,11.953 R19.2 ; U1.48@18.335,29.279 19.401,29.279 20.007,29.884 20.007,30.026 23.241,33.26 v1(23.241,33.331) ; v1(18.415,39.497) 18.719,39.193 20.105,39.193 20.126,39.172 U1.32 ; U1.19 26.626,37.145 28.493,35.279 ; U1.1 U1.1@28.676,29.27 ; R18.1 27.647,26.939 27.626,26.96 U1.64 27.626,28.22 U1.1@28.676,29.27 ; v1(32.258,35.179) 31.034,35.179 30.943,35.27 U1.13 25.18,35.27 v1(23.241,33.331) ; J2.1 42.768,10.191 49.737,10.191 50.388,10.842 50.388,16.325 50.292,16.421 R17.1 ; v1(23.241,33.331) 27.302,29.27 U1.1@28.676,29.27
  Top Layer w0.5: R15.2 1.748,3.377 2.198,3.827 2.198,3.963 2.462,4.227 4.469,4.227 5.319,3.377 R14.2 5.319,3.227 5.769,2.777 5.769,2.641 6.033,2.377 9.476,2.377 9.74,2.641 9.74,2.777 R16.2@10.19,3.227 ; U2.4 U2.4@12.15,11.572 ; U1.48@18.326,29.17 18.288,29.132 18.288,29.083 18.161,28.956 18.161,26.329 15.896,24.064 9.078,24.064 7.366,22.352 7.366,18.17 11.35,14.186 11.35,12.372 U2.4@12.15,11.572 ; J2.1 33.377,3.024 10.393,3.024 R16.2@10.19,3.227 ; R16.2@10.19,3.227 R16.2 10.19,9.612 U2.4@12.15,11.572
  Top Layer w1: C2.1 11.234,20.32 11.24,20.314 11.24,19.232 12.7,17.772 U2.2 U2.4
  Bottom Layer w0.254: J5.1 8.369,61.145 8.369,53.912 15.473,46.809 26.129,46.809 32.258,40.68 32.258,36.92 ; v1(18.415,39.497) 17.247,40.665 16.395,40.665 15.421,41.639 15.421,42.435 15.985,42.999 16.934,42.999 17.442,42.491 26.687,42.491 32.258,36.92 ; v1(23.241,33.331) 23.241,35.295 C4.1@23.114,35.422 ; C5.1 26.231,29.972 25.71,30.492 25.71,30.636 24.429,31.917 C3.1 21.082,33.39 C4.1@23.114,35.422 ; C6.1 26.543,36.899 26.164,36.52 25.328,36.52 24.329,35.52 C4.1 C4.1@23.114,35.422 ; v1(32.258,35.179) 32.258,36.92
NetC9_1: C9.1 U1.30 | length 14.2
  Top Layer w0.254: v1(17.566,43.728) 21.126,40.168 U1.30 ; v1(20.32,45.339) 20.595,45.339 20.978,44.956 23.584,44.956 C9.1
  Bottom Layer w0.254: v1(17.566,43.728) 17.733,43.561 18.542,43.561 v1(20.32,45.339)
NetC19_1: C19.1 U1.6 Y1.1 | length 11.8
  Top Layer w0.254: U1.6 32.083,31.77 32.493,31.36 Y1.1 35.91,31.36 38.766,34.216 38.766,34.673 39.145,35.052 C19.1
NetC20_1: C20.1 U1.5 Y1.2 | length 13.6
  Top Layer w0.254: U1.5 31,31.27 35.21,27.06 Y1.2 35.91,27.06 38.472,24.498 38.472,23.366 38.851,22.987 C20.1
NetD1_1: D1.1 D1.3 D2.1 D2.3 J7.2 R12.2 | length 84.7
  Top Layer w0.254: R12.2 51.069,38.496 52.884,40.311 53.034,40.311 54.407,41.684 56.007,43.284 D1.3
  Top Layer w3: J7.2 44.069,68.792 45.826,67.035 51.964,67.035 56.007,62.992 D1.3 ; D2.1 52.959,20.531 52.959,24.625 56.007,27.673 D2.3 54.407,29.423 54.407,34.694 D1.1 54.407,36.274 D1.3@54.407,41.684
NetD1_2: D1.2 D3.1 D3.3 J8.2 | length 57.4
  Top Layer w3: D1.2 63.64,35.484 D3.1 64.567,36.411 64.567,41.971 D3.3 66.167,43.421 72.644,36.944 72.644,18.796 66.929,13.081 J8.2
NetD2_2: D2.2 D4.1 D4.3 J8.1 | length 22.5
  Top Layer w2: J8.1 55.526,13.131 55.526,17.152 58.247,19.873 D2.2
  Top Layer w3: D2.2 63.65,19.873 D4.1 64.567,20.79 64.567,26.35 D4.3
NetDS2_1: DS2.1 R9.1 | length 2.2
  Top Layer w0.254: R9.1 43.635,48.387 DS2.1
NetDS3_1: DS3.1 R10.1 | length 1.8
  Top Layer w0.254: R10.1 DS3.1
NetDS4_1: DS4.1 R11.1 | length 2.6
  Top Layer w0.254: R11.1 DS4.1
NetDS5_1: DS5.1 R19.1 | length 2.1
  Top Layer w0.254: R19.1 15.95,10.653 16.51,10.093 DS5.1
NetDS6_1: DS6.1 R20.1 | length 1.7
  Top Layer w0.254: DS6.1 R20.1
NetJ2_3: J2.3 U1.46 | length 41.7
  Top Layer w0.254: v1(16.51,26.289) 16.51,29.379 17.393,30.261 U1.46@18.317,30.261
  Bottom Layer w0.254: v1(16.51,26.289) 27.656,15.143 41.928,15.143 45.57,11.502 46.537,11.502 J2.3
NetJ2_4: J2.4 U1.49 | length 37
  Top Layer w0.254: U1.49 20.126,25.467 v1(21.844,23.749)
  Bottom Layer w0.254: v1(21.844,23.749) 36.83,23.749 J2.4
NetJ3_1: J3.1 U7.4 U7.6 | length 9
  Top Layer w0.254: U7.4 20.629,3.749 20.977,4.097 21.039,4.097 21.231,4.289 21.231,5.109 20.839,5.501 20.652,5.501 U7.6 26.443,5.649 J3.1
NetJ4_1: J4.1 R2.1 | length 13.8
  Top Layer w0.254: J4.1 6.738,54.158 6.738,52.855 7.605,51.988 7.605,50.671 7.797,50.479 8.439,50.479 11.352,47.566 R2.1
NetJ4_3: J4.3 R3.1 | length 13.8
  Top Layer w0.254: J4.3 7.151,51.745 7.151,50.483 7.609,50.025 8.251,50.025 9.95,48.326 9.95,44.87 10.817,44.003 11.266,44.003 11.415,43.854 R3.1
NetJ4_5: J4.5 R4.1 | length 13.2
  Top Layer w0.254: J4.5 9.496,47.4 9.496,43.635 10.88,42.251 11.266,42.251 11.415,42.102 R4.1
NetJ4_7: J4.7 R5.1 | length 13
  Top Layer w0.254: J4.7 9.042,45.854 9.042,42.311 10.88,40.473 11.266,40.473 11.415,40.324 R5.1
NetJ4_9: J4.9 R6.1 | length 12.8
  Top Layer w0.254: J4.9 8.588,44.308 8.588,40.987 10.88,38.695 11.266,38.695 11.415,38.546 R6.1
NetJ4_11: J4.11 R7.1 | length 12.5
  Top Layer w0.254: J4.11 8.134,42.762 8.134,39.663 10.88,36.917 11.266,36.917 11.415,36.768 R7.1
NetJ4_13: J4.13 R8.1 | length 12.1
  Top Layer w0.254: J4.13 5.207,40.446 11.415,34.238 R8.1
NetJ5_2: J5.2 U1.17 | length 44.3
  Top Layer w0.254: U1.17 27.626,39.332 29.845,41.551 v1(29.845,41.656)
  Bottom Layer w0.254: J5.2 7.915,60.099 7.915,49.997 11.557,46.355 25.146,46.355 v1(29.845,41.656)
NetJ9_1: J9.1 U6.6 U6.7 | length 25.7
  Bottom Layer w1: U6.6 U6.7 20.066,56.65 21.516,58.1 21.516,68.109 20.943,68.682 J9.1
NetJ10_1: J10.1 U5.6 U5.7 | length 28.1
  Bottom Layer w1: J10.1 26.531,63.639 U5.7 U5.6
NetJ11_1: J11.1 U4.6 U4.7 | length 31.2
  Bottom Layer w1: J11.1 32.246,71.513 U4.7 U4.6
NetJ12_1: J12.1 R14.1 U1.43 | length 42.6
  Top Layer w0.254: J12.1 10.815,31.77 U1.43
  Top Layer w0.5: J12.1 1.521,22.476 1.521,7.452 3.266,5.708 4.424,5.708 6.169,3.963 6.169,3.827 6.619,3.377 R14.1
NetJ12_3: J12.3 R16.1 U1.42 | length 43.2
  Top Layer w0.254: J12.3 9.311,30.908 10.673,32.27 U1.42 U1.42@18.317,32.261
  Top Layer w0.5: v1(8.509,5.334) 8.89,4.953 R16.1
  Bottom Layer w0.5: J12.3 8.509,27.352 v1(8.509,5.334)
NetJ12_5: J12.5 R15.1 U1.41 | length 52.4
  Top Layer w0.254: J12.5 8.091,32.77 18.308,32.77 18.317,32.761 U1.41
  Top Layer w0.5: v1(2.159,1.651) 2.898,2.39 2.898,3.152 R15.1
  Bottom Layer w0.5: v1(2.159,1.651) 2.159,1.859 1.821,2.197 1.821,32.776 J12.5
NetR2_2: R2.2 U1.61 | length 29.3
  Top Layer w0.254: R2.2 12.652,44.73 12.925,44.457 13,44.457 15.367,42.09 16.33,42.09 v1(16.383,42.037) ; v1(24.384,25.273) 24.578,25.467 25.048,25.467 25.37,25.789 25.512,25.789 26.117,26.395 26.117,27.461 U1.61
  Bottom Layer w0.254: v1(16.383,42.037) 17.82,42.037 20.193,39.664 20.193,29.21 24.13,25.273 v1(24.384,25.273)
NetR3_2: R3.2 U1.62 | length 29.2
  Top Layer w0.254: R3.2 12.715,42.978 16.323,39.37 v1(16.383,39.37) ; U1.62 26.617,27.461 26.635,27.444 26.635,26.197 26.797,26.035 v1(26.797,25.019)
  Bottom Layer w0.254: v1(16.383,39.37) 16.383,31.837 23.963,24.257 26.035,24.257 v1(26.797,25.019)
NetR4_2: R4.2 U1.29 | length 11.6
  Top Layer w0.254: R4.2 12.715,41.2 13.964,39.951 14.442,39.951 17.05,37.343 21.324,37.343 21.617,37.637 21.617,38.561 U1.29
NetR5_2: R5.2 U1.33 | length 6.7
  Top Layer w0.254: R5.2 13.851,39.497 16.578,36.77 U1.33
NetR6_2: R6.2 U1.34 | length 6.2
  Top Layer w0.254: R6.2 14.547,37.719 15.996,36.27 U1.34
NetR7_2: R7.2 U1.35 | length 5.7
  Top Layer w0.254: R7.2 15.19,35.941 15.361,35.77 U1.35 U1.35@18.317,35.761
NetR8_2: R8.2 U1.36 | length 6.1
  Top Layer w0.254: R8.2 14.722,34.163 15.829,35.27 U1.36 U1.36@18.317,35.261
NetR9_2: R9.2 U1.21 U4.2 | length 28.1
  Top Layer w0.254: U1.21 25.635,38.579 25.635,39.503 34.518,48.387 R9.2 40.356,50.568 40.755,50.967 40.755,55.384 U4.2
NetR10_2: R10.2 U1.22 U5.2 | length 19.8
  Top Layer w0.254: U1.22 25.126,40.444 27.779,43.097 27.779,48.241 R10.2 28.052,54.498 U5.2
NetR11_2: R11.2 U1.23 U6.2 | length 23.7
  Top Layer w0.254: U6.2 14.209,54.752 R11.2 14.209,48.693 18.94,43.962 20.159,43.962 24.617,39.503 24.617,38.579 U1.23
NetR12_1: R12.1 R13.2 U1.16 | length 6.7
  Top Layer w0.254: U1.16 32.011,36.77 32.164,36.923 33.89,36.923 R12.1 ; R13.2 R12.1@34.29,37.069
NetU1_51: U1.51 U7.2 | length 33.3
  Top Layer w0.254: U7.2@17.979,4.699 U7.2 18.229,4.699 18.577,5.047 18.765,5.047 20.445,6.727 25.429,6.727 27.309,8.608 27.309,15.078 25.71,16.677 25.71,19.583 26.458,20.332 26.458,21.724 24.325,23.857 23.797,23.857 22.968,24.686 22.968,24.703 21.135,26.537 21.135,27.461 U1.51
NRST: C21.1 R17.2 SW1.1 U1.7 | length 25.8
  Top Layer w0.254: U1.7 31,32.27 v1(32.004,33.274) ; v1(43.561,32.131) 43.685,32.255 45.936,32.255 46.609,32.928 SW1.1 49.262,33.228 50.217,32.273 R17.2 C21.1
  Bottom Layer w0.254: v1(32.004,33.274) 33.474,31.804 43.234,31.804 v1(43.561,32.131)
USB_N: U1.44 U8.6 | length 18.8
  Top Layer w0.2: U8.6 2.86,22.276 3.231,22.646 3.231,22.679 3.406,22.855 3.493,22.855 3.61,22.972 3.61,23.304 5.214,24.908 5.777,24.908 12.089,31.22 17.499,31.22 U1.44@17.549,31.27
USB_P: U1.45 U8.4 | length 19
  Top Layer w0.2: U8.4 4.76,22.276 4.389,22.646 4.389,22.679 4.214,22.855 4.127,22.855 4.01,22.972 4.01,23.138 5.38,24.508 5.943,24.508 12.255,30.82 17.39,30.82 17.42,30.789 18.307,30.789 U1.45
pads on no net: J6.4 J6.6 J6.7 J6.8 J6.9 J6.10 J6.11 U1.2 U1.3 U1.4 U1.8 U1.9 U1.10 U1.11 U1.14 U1.15 U1.20 U1.24 U1.25 U1.26 U1.27 U1.28 U1.37 U1.38 U1.39 U1.40 U1.50 U1.52 U1.53 U1.54 U1.55 U1.56 U1.57 U1.58 U1.59 U4.3 U5.3 U6.3 U7.5

## Polygon pours and split planes (outlines as drawn)
GND on Top Layer "GND_L01_P002" (solid, pour order 2): 0,0 74.55,0 74.55,83.83 0,83.83

## Silkscreen, mask and mechanical layers (free items; w line width, h text height)
Top Overlay:
  drawing of 51 lines, arcs and shapes, not listed
  text "400V DC" at 41.156,73.017 h1.52 r90
  text "+" at 38.981,69.469 h3
  text "-" at 47.109,67.707 h3
  text "+12V" at 44.86,25.4 h1
  text "3V3" at 40.867,12.419 h0.6
  text "GND" at 43.407,12.419 h0.6
  text "IO" at 46.328,12.419 h0.6
  text "CLK" at 48.36,12.419 h0.6
  text "400VAC" at 63.862,2.178 h1.52 r90
Top Solder:
  lines w2: 55.476,13.081 55.476,16.995 58.293,19.812
  lines w3: 44.069,70.993 44.069,70.866 44.069,68.834 45.847,67.056 47.879,67.056 51.943,67.056 56.007,62.992 56.007,46.228 ; 53.594,19.812 53.594,19.939 52.959,20.574 52.959,24.638 53.848,25.527 ; 54.356,40.64 54.356,36.195 53.594,35.433 54.483,34.544 54.483,30.48 ; 58.293,19.812 63.627,19.812 64.643,20.828 64.643,25.781 ; 58.42,35.56 63.754,35.56 64.643,36.449 64.643,40.64 ; 59.436,13.081 66.929,13.081 72.644,18.796 72.644,36.957 68.263,41.338

## Text inside footprints (layer, text, board x,y; h text height)
J6: Mechanical 1 "PCB EDGE" at 1.371,18.646 h0.3 r270
SW2: Top Overlay "ON" at 42.948,19.088 h1.02 r270; Top Component Outline "1" at 38.348,18.388 h1.02 r270; Top Component Outline "ON" at 42.948,19.088 h1.02 r270
U8: Top 3D Body "*" at 3.632,19.888 h1.27 r90